# EAGLE board BACKPLANE-2UP-PA1 (EAGLE 9.4.2)
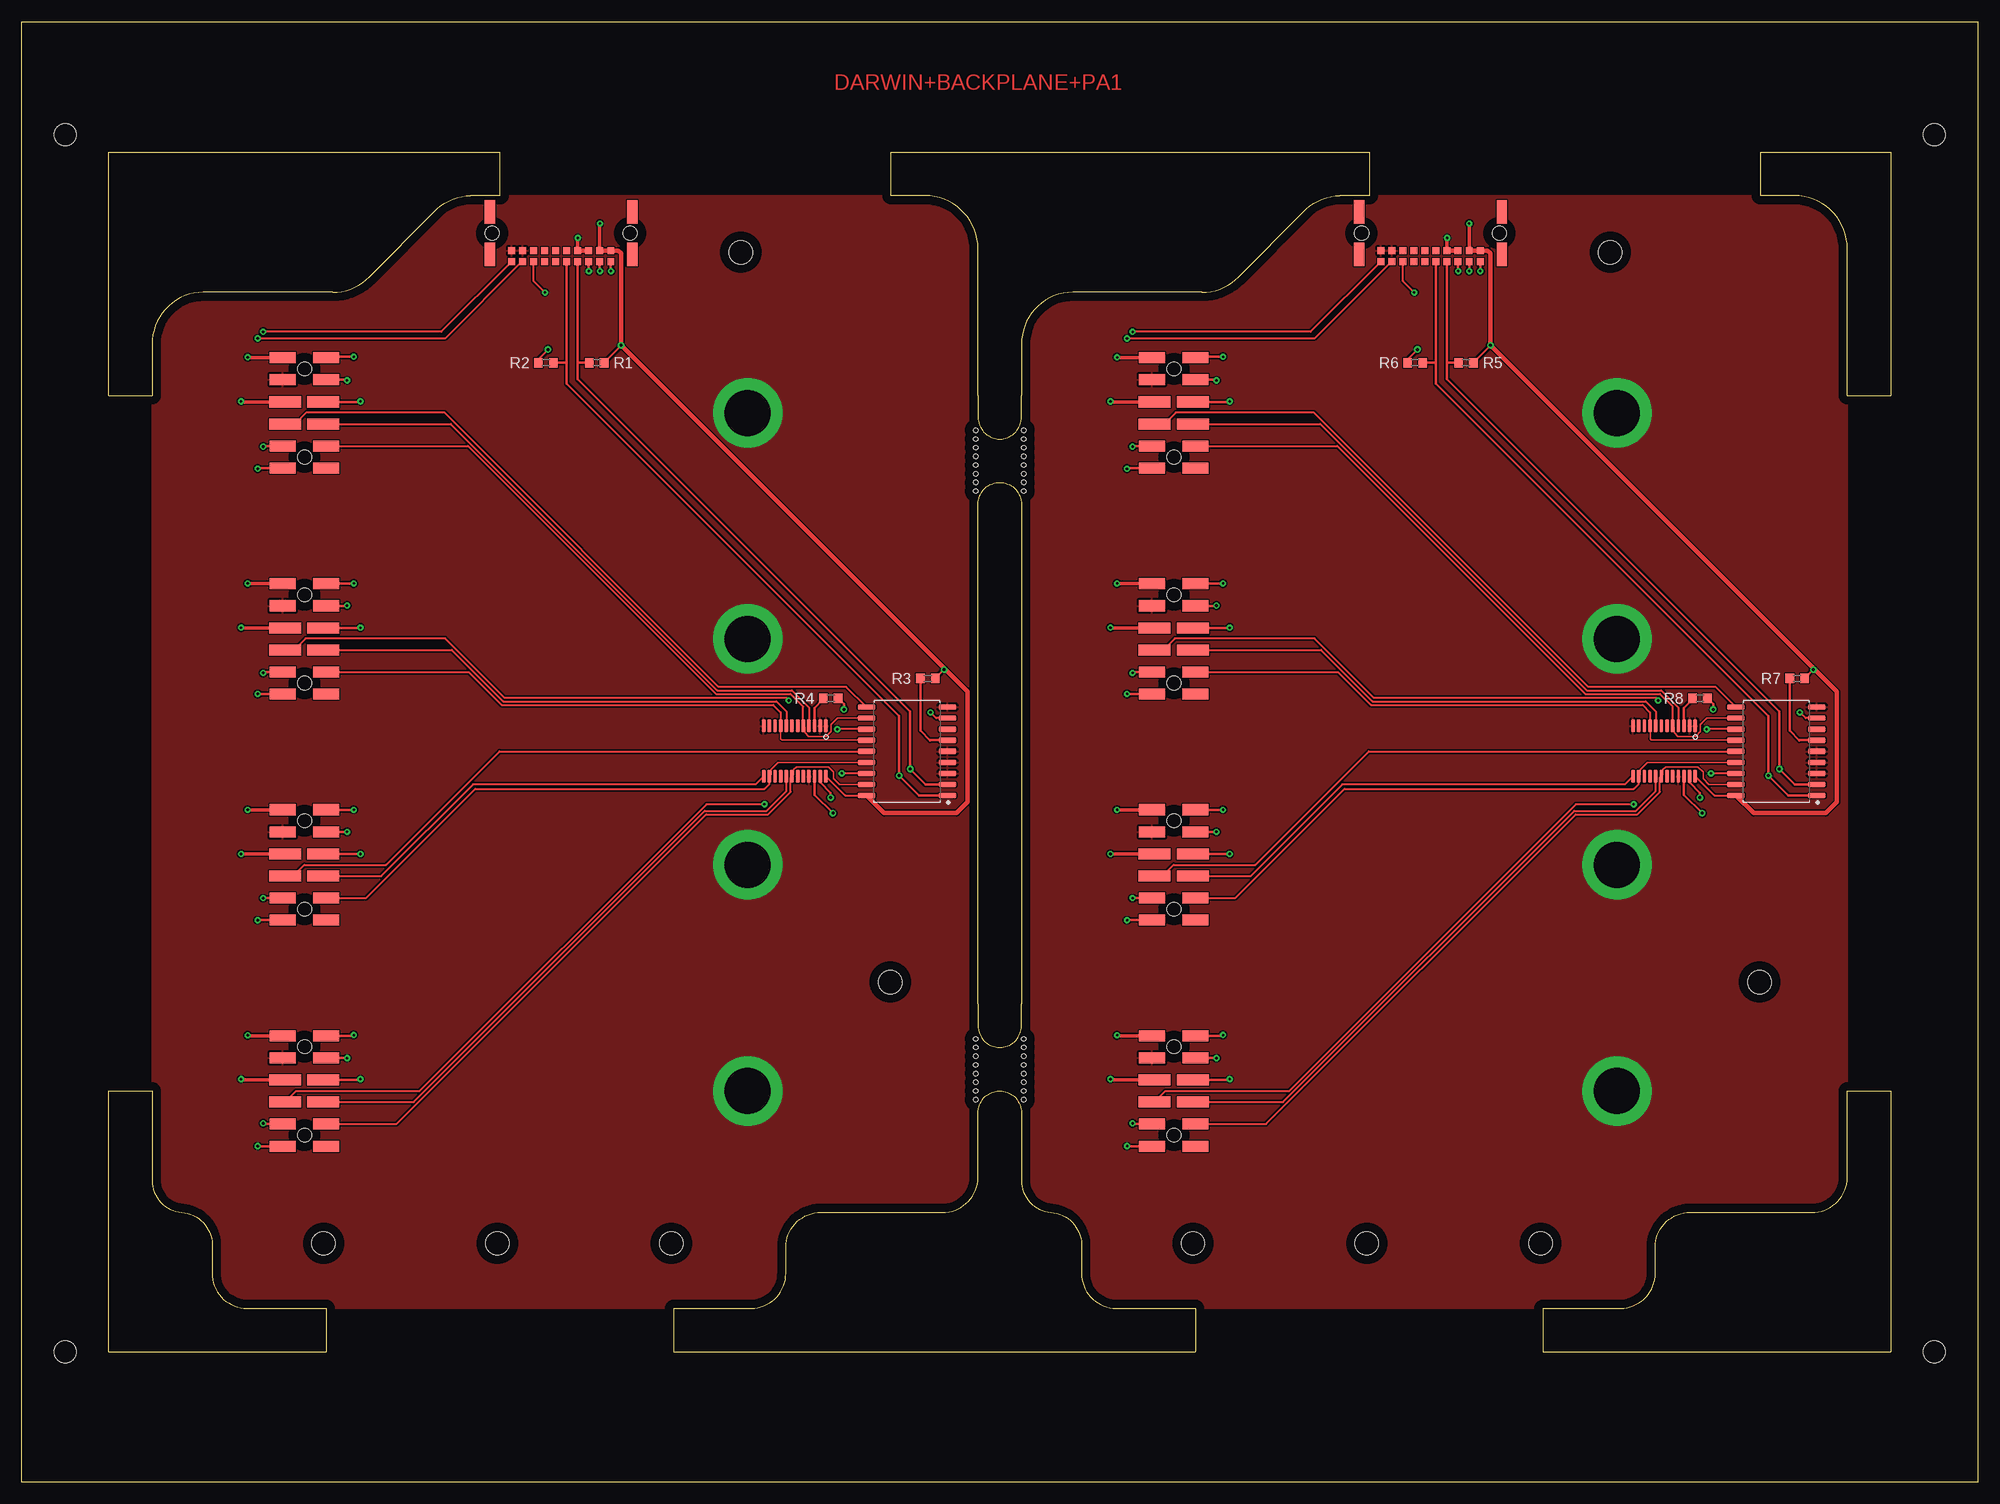
[diagram p0: board, top side]
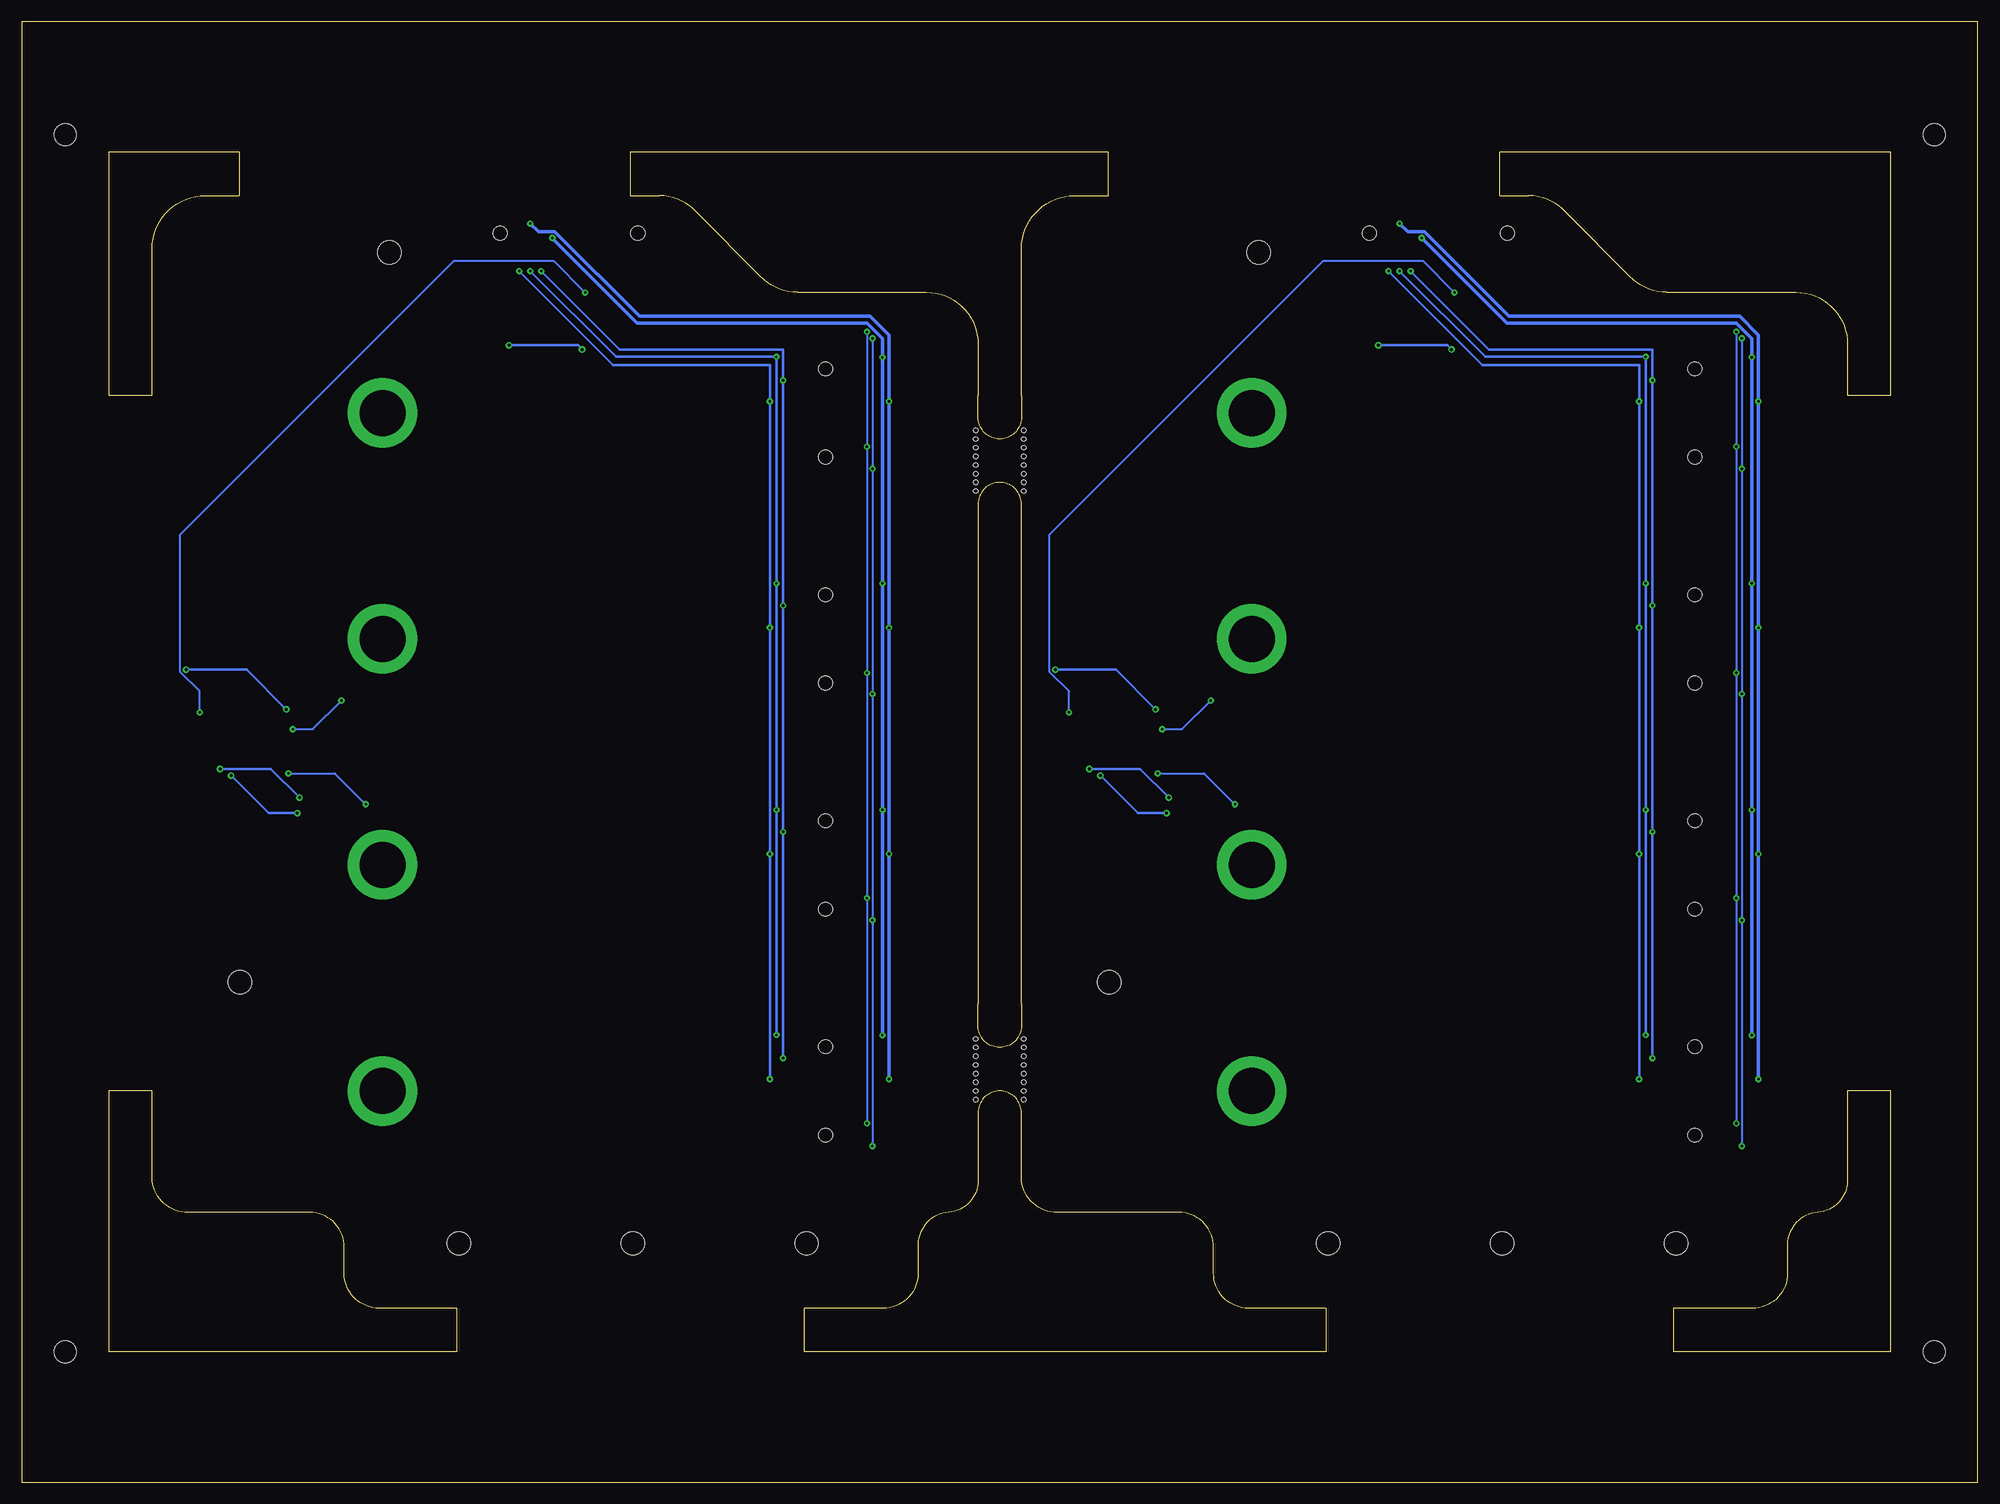
[diagram p1: board, bottom side, seen from below]

Size 225 x 168 mm. Coordinates in mm from the lower left corner, seen from the top.
Outline: 35.75,136.88 20.9,136.88 arc90 15,130.88 15,125 10,125 10,153 55,153 55,148 51.65,148 arc45 47.38,146.1 40.01,138.66 arc-45 35.75,136.88
Outline: 110,141.88 arc90 103.9,148 100,148 100,153 155,153 155,148 151.65,148 arc45 147.38,146.1 140.01,138.66 arc-45 135.75,136.88 120.9,136.88 arc90 115,130.88 115,125 115,122.5 arc-90 112.5,120 arc-90 110,122.5 110,125 110,141.88
Outline: 15,35.02 arc90 18.4,31.02 arc-90 21.9,27.02 21.9,24.02 arc90 25.9,20 35,20 35,15 10,15 10,45 15,45 15,35.02
Outline: 83.9,20 arc90 87.9,24.02 87.9,27.02 arc-90 91.9,31.02 105.9,31.02 arc90 110,35.02 110,40 110,42.5 arc-90 112.5,45 arc-90 115,42.5 115,40 115,35.02 arc90 118.4,31.02 arc-90 121.9,27.02 121.9,24.02 arc90 125.9,20 135,20 135,15 75,15 75,20 83.9,20
Outline: 210,141.88 arc90 203.9,148 200,148 200,153 215,153 215,125 210,125 210,141.88
Outline: 183.9,20 arc90 187.9,24.02 187.9,27.02 arc-90 191.9,31.02 205.9,31.02 arc90 210,35.02 210,45 215,45 215,15 175,15 175,20 183.9,20
Outline: 0,0 0,168 225,168 225,0 0,0
Outline: 110,110 110,112.5 arc-90 112.5,115 arc-90 115,112.5 115,110 115,55 115,52.5 arc-90 112.5,50 arc-90 110,52.5 110,55 110,110
Copper layers (1*16): Top 0.035mm / dielectric 1.5mm / Bottom 0.035mm
Design rules "default": minimum track width 6mil, minimum drill 0.35mm, track to track 6mil, track to pad 6mil, pad to pad 6mil, via to via 6mil, smd to smd 6mil, copper to edge 40mil, drill to drill 6mil, minimum pad ring 10mil, minimum via ring 8mil, stop-mask expansion 4mil, vias tented up to drill 0mil, thermal gap 10mil
Holes 2.7 mm at 34.72,27.47 54.72,27.47 74.72,27.47 99.9,57.52 82.72,141.47 134.72,27.47 154.72,27.47 174.72,27.47 199.9,57.52 182.72,141.47
Holes 2.54 mm at 5,155 5,15 220,15 220,155
Holes 0.5 mm at 109.75,121 109.75,120 109.75,119 109.75,118 109.75,117 109.75,116 109.75,115 109.75,114 115.25,121 115.25,120 115.25,119 115.25,118 115.25,117 115.25,116 115.25,115 115.25,114 109.75,51 109.75,50 109.75,49 109.75,48 109.75,47 109.75,46 109.75,45 109.75,44 115.25,51 115.25,50 115.25,49 115.25,48 115.25,47 115.25,46 115.25,45 115.25,44

## Footprints (pad centres in the part's own frame; a part is rotated, then mirrored left to right if it is on the bottom)
R0603 = smd 1 x 1.1: 1 -0.85,0; 2 0.85,0
SOIC18-W = smd 2.052 x 0.602: 1 -4.654,5.08; 2 -4.654,3.81; 3 -4.654,2.54; 4 -4.654,1.27; 5 -4.654,0; 6 -4.654,-1.27; 7 -4.654,-2.54; 8 -4.654,-3.81; 9 -4.654,-5.08; 10 4.654,-5.08; 11 4.654,-3.81; 12 4.654,-2.54; 13 4.654,-1.27; 14 4.654,0; 15 4.654,1.27; 16 4.654,2.54; 17 4.654,3.81; 18 4.654,5.08
12PH = smd 3 x 1.27: 1 -2.5,6.35; 2 -2.5,3.81; 5 -2.5,-3.81; 6 -2.5,-6.35; 7 2.5,-6.35; 8 2.5,-3.81; 11 2.5,3.81; 12 2.5,6.35 | smd 3.68 x 1.27: 3 -2.2,1.27; 4 -2.2,-1.27; 9 2.2,-1.27; 10 2.2,1.27 | hole 1.58: 0.041,5.08; 0.041,-5.08
TSSOP-24 = smd 1.5 x 0.45: PIN1 -3,3; PIN2 -3,2.35; PIN3 -3,1.7; PIN4 -3,1.05; PIN5 -3,0.4; PIN6 -3,-0.25; PIN7 -3,-0.9; PIN8 -3,-1.55; PIN9 -3,-2.2; PIN10 -3,-2.85; PIN11 -3,-3.5; PIN12 -3,-4.15; PIN13 2.8,-4.15; PIN14 2.8,-3.5; PIN15 2.8,-2.85; PIN16 2.8,-2.2; PIN17 2.8,-1.55; PIN18 2.8,-0.9; PIN19 2.8,-0.25; PIN20 2.8,0.4; PIN21 2.8,1.05; PIN22 2.8,1.7; PIN23 2.8,2.35; PIN24 2.8,3
M55-7102042R = smd 0.8 x 0.8: P1 -5.715,3.27; P2 -4.445,3.27; P3 -3.175,3.27; P4 -1.905,3.27; P5 -0.635,3.27; P6 0.635,3.27; P7 1.905,3.27; P8 3.175,3.27; P9 4.445,3.27; P10 5.715,3.27; P11 5.715,2; P12 4.445,2; P13 3.175,2; P14 1.905,2; P15 0.635,2; P16 -0.635,2; P17 -1.905,2; P18 -3.175,2; P19 -4.445,2; P20 -5.715,2 | smd 1.2 x 2.7: PAD0 -8.21,-2.45; PAD1 8.21,-2.45; PAD2 8.21,2.45; PAD3 -8.21,2.45 | hole 1.65: -7.925,0; 7.925,0

## Placement (x,y rotation side)
R1  [R0603]  66.13,128.78 0 top
R2  [R0603]  60.29,128.78 180 top
R3  [R0603]  104.23,92.45 180 top
R4  [R0603]  93.05,90.17 180 top
R5  [R0603]  166.13,128.78 0 top
R6  [R0603]  160.29,128.78 180 top
R7  [R0603]  204.23,92.45 180 top
R8  [R0603]  193.05,90.17 180 top
U$1  MCP23008  [SOIC18-W]  101.83,84.07 180 top
U$2  2X6-HEADERSDS  [12PH]  32.5,123 0 top
U$3  2X6-HEADERSDS  [12PH]  32.5,97 0 top
U$4  2X6-HEADERSDS  [12PH]  32.5,71 0 top
U$5  2X6-HEADERSDS  [12PH]  32.5,45 0 top
U$6  TCA9548A  [TSSOP-24]  89.5,84 270 top
U$7  M55-6102042R7102(M)  [M55-7102042R]  162.05,143.68 180 top
U$8  MCP23008  [SOIC18-W]  201.83,84.07 180 top
U$9  2X6-HEADERSDS  [12PH]  132.5,123 0 top
U$10  2X6-HEADERSDS  [12PH]  132.5,97 0 top
U$11  2X6-HEADERSDS  [12PH]  132.5,71 0 top
U$12  2X6-HEADERSDS  [12PH]  132.5,45 0 top
U$13  M55-6102042R7102(M)  [M55-7102042R]  62.05,143.68 180 top
U$14  TCA9548A  [TSSOP-24]  189.5,84 270 top

## Library data of the parts
R1-R8 = rcl; SPICEPREFIX: R
U$1-U$14 = Conservify

## Nets
3V1: R5.2 R6.2 R7.1 R8.1 U$7.P19 U$7.P20 U$8.18 U$9.3 U$10.3 U$11.3 U$12.3 U$14.PIN24
3V3: R1.2 R2.2 R3.1 R4.1 U$1.18 U$2.3 U$3.3 U$4.3 U$5.3 U$6.PIN24 U$13.P19 U$13.P20
!RESET: R3.2 U$1.6
!RESET1: R7.2 U$8.6
EEPROM_PROT: U$2.5 U$3.5 U$4.5 U$5.5 U$13.P10
EEPROM_PROT1: U$7.P10 U$9.5 U$10.5 U$11.5 U$12.5
GND: U$1.3 U$1.4 U$1.5 U$1.9 U$2.2 U$3.2 U$4.2 U$5.2 U$6.PIN1 U$6.PIN2 U$6.PIN12 U$6.PIN21 U$13.P11 U$13.P12
GND1: U$7.P11 U$7.P12 U$8.3 U$8.4 U$8.5 U$8.9 U$9.2 U$10.2 U$11.2 U$12.2 U$14.PIN1 U$14.PIN2 U$14.PIN12 U$14.PIN21
HOTSWAP_INT: U$1.8 U$13.P8
HOTSWAP_INT1: U$7.P8 U$8.8
M0_ENABLE: U$1.10 U$2.4
M0_ENABLE1: U$8.10 U$9.4
M1_ENABLE: U$1.12 U$3.4
M1_ENABLE1: U$8.12 U$10.4
M2_ENABLE: U$1.14 U$4.4
M2_ENABLE1: U$8.14 U$11.4
M3_ENABLE: U$1.16 U$5.4
M3_ENABLE1: U$8.16 U$12.4
MOD_G1: U$7.P9 U$9.6 U$10.6 U$11.6 U$12.6
MOD_G2: U$2.6 U$3.6 U$4.6 U$5.6 U$13.P9
MOD_G3: U$7.P7
MOD_G4: U$13.P7
MOD_G5: U$13.P6
MOD_G6: U$7.P6
MOD_MISO: U$2.10 U$3.10 U$4.10 U$5.10 U$13.P1
MOD_MISO1: U$7.P1 U$9.10 U$10.10 U$11.10 U$12.10
MOD_MOSI: U$2.11 U$3.11 U$4.11 U$5.11 U$13.P3
MOD_MOSI1: U$7.P3 U$9.11 U$10.11 U$11.11 U$12.11
MOD_SCK: U$2.12 U$3.12 U$4.12 U$5.12 U$13.P2
MOD_SCK1: U$7.P2 U$9.12 U$10.12 U$11.12 U$12.12
MOD_SCL: R2.1 U$1.1 U$6.PIN22 U$13.P5
MOD_SCL1: R6.1 U$7.P5 U$8.1 U$14.PIN22
MOD_SDA: R1.1 U$1.2 U$6.PIN23 U$13.P4
MOD_SDA1: R5.1 U$7.P4 U$8.2 U$14.PIN23
N$1: R8.2 U$14.PIN3
N$2: R4.2 U$6.PIN3
SC0: U$1.11 U$2.8 U$6.PIN5
SC1: U$1.13 U$3.8 U$6.PIN9
SC2: U$1.15 U$4.8 U$6.PIN14
SC3: U$1.17 U$5.8 U$6.PIN18
SC4: U$8.11 U$9.8 U$14.PIN5
SC5: U$8.13 U$10.8 U$14.PIN9
SC6: U$8.15 U$11.8 U$14.PIN14
SC7: U$8.17 U$12.8 U$14.PIN18
SD0: U$2.9 U$6.PIN4
SD1: U$3.9 U$6.PIN8
SD2: U$4.9 U$6.PIN13
SD3: U$5.9 U$6.PIN17
SD4: U$9.9 U$14.PIN4
SD5: U$12.9 U$14.PIN17
SD6: U$11.9 U$14.PIN13
SD7: U$10.9 U$14.PIN8
UNREG: U$2.1 U$3.1 U$4.1 U$5.1 U$13.P17 U$13.P18
UNREG1: U$7.P17 U$7.P18 U$9.1 U$10.1 U$11.1 U$12.1
XX1: U$13.P13
XX2: U$13.P14
XX3: U$13.P15
XX4: U$13.P16
XX5: U$7.P15
XX6: U$7.P13
XX7: U$7.P14
XX8: U$7.P16

## Tracks (layer width: path | path; a pad name or v marks a point on that pad's centre or on a via)
3V1  (via drill 0.3, 0.35)
  Top 0.254: U$14.PIN24 194.71,78.99 U$8.18
  Top 0.305: R7.1 v206.09,93.47 206.26,93.47 | R8.1 194.58,89.49 v194.58,88.9 | R5.2 168.95,130.75 v168.95,130.78 | R6.2 159.44,129.2 v160.54,130.3
  Top 0.406: U$7.P19 166.49,144.76 v166.51,144.78 | U$9.3 125.3,124.27 v125.23,124.33 | U$10.3 125.26,98.27 v125.23,98.3 | U$11.3 125.24,72.27 v125.23,72.26 | U$12.3 125.32,46.27 v125.23,46.35
  Top 0.508: U$8.18 199.21,76.96 207.53,76.96 208.8,78.23 208.8,90.93 206.26,93.47 v168.95,130.78 168.95,141.35 168.62,141.68 U$7.P20 U$7.P19
  Bottom 0.305: v160.54,130.3 161.02,130.78 v168.95,130.78 | v194.58,88.9 199.15,93.47 v206.09,93.47
  Bottom 0.406: v166.51,144.78 165.57,143.84 163.68,143.84 153.95,134.11 127.39,134.11 125.23,131.95 v125.23,124.33 v125.23,98.3 v125.23,72.26 v125.23,46.35
3V3  (via drill 0.3, 0.35)
  Top 0.254: U$6.PIN24 94.71,78.99 U$1.18
  Top 0.305: R3.1 v106.09,93.47 106.26,93.47 | R4.1 94.58,89.49 v94.58,88.9 | R1.2 68.95,130.75 v68.95,130.78 | R2.2 59.44,129.2 v60.54,130.3
  Top 0.406: U$13.P19 66.49,144.76 v66.51,144.78 | U$2.3 25.3,124.27 v25.23,124.33 | U$3.3 25.26,98.27 v25.23,98.3 | U$4.3 25.24,72.27 v25.23,72.26 | U$5.3 25.32,46.27 v25.23,46.35
  Top 0.508: U$1.18 99.21,76.96 107.53,76.96 108.8,78.23 108.8,90.93 106.26,93.47 v68.95,130.78 68.95,141.35 68.62,141.68 U$13.P20 U$13.P19
  Bottom 0.305: v60.54,130.3 61.02,130.78 v68.95,130.78 | v94.58,88.9 99.15,93.47 v106.09,93.47
  Bottom 0.406: v66.51,144.78 65.57,143.84 63.67,143.84 53.95,134.11 27.39,134.11 25.23,131.95 v25.23,124.33 v25.23,98.3 v25.23,72.26 v25.23,46.35
!RESET
  Top 0.305: U$1.6 104.48,85.34 103.38,86.45 R3.2
!RESET1
  Top 0.305: U$8.6 204.48,85.34 203.38,86.45 R7.2
EEPROM_PROT  (via drill 0.3)
  Top 0.254: U$13.P10 48.26,132.33 v27.77,132.33
  Top 0.305: U$2.5 27.84,119.19 v27.77,119.12 | U$3.5 27.88,93.19 v27.77,93.09 | U$4.5 27.78,67.19 v27.77,67.18 | U$5.5 27.86,41.19 v27.77,41.27
  Bottom 0.254: v27.77,132.33 v27.77,119.12 v27.77,93.09 v27.77,67.18 v27.77,41.27
EEPROM_PROT1  (via drill 0.3)
  Top 0.254: U$7.P10 148.26,132.33 v127.77,132.33
  Top 0.305: U$9.5 127.84,119.19 v127.77,119.12 | U$10.5 127.88,93.19 v127.77,93.09 | U$11.5 127.78,67.19 v127.77,67.18 | U$12.5 127.86,41.19 v127.77,41.27
  Bottom 0.254: v127.77,132.33 v127.77,119.12 v127.77,93.09 v127.77,67.18 v127.77,41.27
GND  (via drill 5.3 pad 8)
  other vias: 83.5,123 83.5,97 83.5,71 83.5,45
  pour Top: 15,148 110,148 110,20 15,20
GND1  (via drill 5.3 pad 8)
  other vias: 183.5,123 183.5,97 183.5,71 183.5,45
  pour Top: 115,148 210,148 210,20 115,20
HOTSWAP_INT  (via drill 0.3)
  Top 0.254: U$1.8 105.19,87.88 v104.53,88.54 | v60.18,136.85 58.87,138.16 U$13.P8
  Bottom 0.254: v104.53,88.54 104.53,90.98 106.75,93.2 106.75,109.03 75.27,140.51 63.84,140.51 v60.18,136.85
HOTSWAP_INT1  (via drill 0.3)
  Top 0.254: U$8.8 205.19,87.88 v204.53,88.54 | v160.18,136.85 158.87,138.16 U$7.P8
  Bottom 0.254: v204.53,88.54 204.53,90.98 206.75,93.2 206.75,109.03 175.27,140.51 163.84,140.51 v160.18,136.85
M0_ENABLE
  Top 0.254: U$1.10 94.84,91.49 80.18,91.49 48.62,123.04 32.74,123.04 31.43,121.73 U$2.4
M0_ENABLE1
  Top 0.254: U$8.10 194.84,91.49 180.18,91.49 148.62,123.04 132.74,123.04 131.43,121.73 U$9.4
M1_ENABLE  (via drill 0.3)
  Top 0.254: U$1.12 v93.82,86.61 v93.81,86.61 | v88.23,89.91 88.23,89.98 87.99,90.22 55.54,90.22 48.72,97.04 32.64,97.04 31.33,95.73 U$3.4
  Bottom 0.254: v93.81,86.61 91.53,86.61 v88.23,89.91
M1_ENABLE1  (via drill 0.3)
  Top 0.254: U$8.12 v193.82,86.61 v193.81,86.61 | v188.23,89.91 188.23,89.98 187.99,90.22 155.54,90.22 148.72,97.04 132.64,97.04 131.33,95.73 U$10.4
  Bottom 0.254: v193.81,86.61 191.53,86.61 v188.23,89.91
M2_ENABLE
  Top 0.254: U$4.4 31.21,69.73 32.5,71.02 41.9,71.02 54.95,84.07 U$1.14
M2_ENABLE1
  Top 0.254: U$11.4 131.21,69.73 132.5,71.02 141.9,71.02 154.95,84.07 U$8.14
M3_ENABLE  (via drill 0.3)
  Top 0.254: U$1.16 v94.32,81.53 | v85.43,77.98 78.76,77.98 45.74,44.96 31.53,44.96 U$5.4
  Bottom 0.254: v94.32,81.53 88.99,81.53 v85.43,77.98
M3_ENABLE1  (via drill 0.3)
  Top 0.254: U$8.16 v194.32,81.53 | v185.43,77.98 178.76,77.98 145.74,44.96 131.53,44.96 U$12.4
  Bottom 0.254: v194.32,81.53 188.99,81.53 v185.43,77.98
MOD_G1  (via drill 0.3)
  Top 0.254: U$7.P9 157.53,140.41 148.69,131.57 v127.14,131.57
  Top 0.305: U$9.6 127.2,116.65 v127.14,116.58 | U$10.6 127.17,90.65 v127.14,90.68 | U$11.6 v127.15,64.65 v127.14,64.64 | U$12.6 v127.15,38.65 v127.14,38.66
  Bottom 0.254: v127.14,131.57 v127.14,116.58 v127.14,90.68 v127.14,64.64 v127.14,38.66
MOD_G2  (via drill 0.3)
  Top 0.254: U$13.P9 57.53,140.41 48.69,131.57 v27.14,131.57
  Top 0.305: U$2.6 27.2,116.65 v27.14,116.58 | U$3.6 27.17,90.65 v27.14,90.68 | U$4.6 v27.15,64.65 v27.14,64.64 | U$5.6 v27.15,38.65 v27.14,38.66
  Bottom 0.254: v27.14,131.57 v27.14,116.58 v27.14,90.68 v27.14,64.64 v27.14,38.66
MOD_MISO  (via drill 0.3)
  Top 0.305: U$13.P1 67.76,139.33 v67.78,139.32 | U$2.10 38.89,124.27 v38.95,124.33 | U$3.10 38.92,98.27 v38.95,98.3 | U$4.10 v38.94,72.27 v38.95,72.26 | U$5.10 38.87,46.27 v38.95,46.35
  Bottom 0.305: v67.78,139.32 56.98,128.52 38.95,128.52 v38.95,124.33 v38.95,98.3 v38.95,72.26 v38.95,46.35
MOD_MISO1  (via drill 0.3)
  Top 0.305: U$7.P1 167.76,139.33 v167.78,139.32 | U$9.10 138.89,124.27 v138.95,124.33 | U$10.10 138.92,98.27 v138.95,98.3 | U$11.10 v138.94,72.27 v138.95,72.26 | U$12.10 138.87,46.27 v138.95,46.35
  Bottom 0.305: v167.78,139.32 156.98,128.52 138.95,128.52 v138.95,124.33 v138.95,98.3 v138.95,72.26 v138.95,46.35
MOD_MOSI  (via drill 0.3)
  Top 0.305: U$13.P3 65.22,139.33 v65.24,139.32 | U$2.11 37.36,126.81 v37.43,126.74 | U$3.11 37.4,100.81 v37.43,100.84 | U$4.11 37.42,74.81 v37.43,74.8 | U$5.11 37.38,48.81 v37.43,48.77
  Bottom 0.305: v65.24,139.32 56.22,130.3 37.43,130.3 v37.43,126.74 v37.43,100.84 v37.43,74.8 v37.43,48.77
MOD_MOSI1  (via drill 0.3)
  Top 0.305: U$7.P3 165.22,139.33 v165.24,139.32 | U$9.11 137.36,126.81 v137.43,126.74 | U$10.11 137.4,100.81 v137.43,100.84 | U$11.11 137.42,74.81 v137.43,74.8 | U$12.11 137.38,48.81 v137.43,48.77
  Bottom 0.305: v165.24,139.32 156.22,130.3 137.43,130.3 v137.43,126.74 v137.43,100.84 v137.43,74.8 v137.43,48.77
MOD_SCK  (via drill 0.3)
  Top 0.305: U$13.P2 66.49,139.33 v66.51,139.32 | U$2.12 35.11,129.46 v38.19,129.46 | U$3.12 38.16,103.35 v38.19,103.38 | U$4.12 v38.18,77.35 v38.19,77.34 | U$5.12 38.1,51.35 v38.19,51.43
  Bottom 0.305: v66.51,139.32 56.65,129.46 v38.19,129.46 v38.19,103.38 v38.19,77.34 v38.19,51.43
MOD_SCK1  (via drill 0.3)
  Top 0.305: U$7.P2 166.49,139.33 v166.51,139.32 | U$9.12 135.11,129.46 v138.19,129.46 | U$10.12 138.16,103.35 v138.19,103.38 | U$11.12 v138.18,77.35 v138.19,77.34 | U$12.12 138.1,51.35 v138.19,51.43
  Bottom 0.305: v166.51,139.32 156.65,129.46 v138.19,129.46 v138.19,103.38 v138.19,77.34 v138.19,51.43
MOD_SCL  (via drill 0.35)
  Top 0.305: U$13.P5 62.68,128.78 | 62.68,128.78 62.68,126.38 100.93,88.14 v100.93,81.28 103.21,78.99 U$1.1 | U$6.PIN22 91.2,79.07 v93.31,76.96 | R2.1 62.68,128.78
  Bottom 0.305: v93.31,76.96 96.61,76.96 v100.93,81.28
MOD_SCL1  (via drill 0.35)
  Top 0.305: U$7.P5 162.68,128.78 | 162.68,128.78 162.68,126.38 200.93,88.14 v200.93,81.28 203.21,78.99 U$8.1 | U$14.PIN22 191.2,79.07 v193.31,76.96 | R6.1 162.68,128.78
  Bottom 0.305: v193.31,76.96 196.61,76.96 v200.93,81.28
MOD_SDA  (via drill 0.35)
  Top 0.305: U$13.P4 63.95,128.78 | 63.95,128.78 63.95,126.89 102.2,88.64 v102.2,82.04 103.97,80.26 U$1.2 | v93.05,78.74 93.05,79.3 91.87,80.48 91.87,81.18 U$6.PIN23 | R1.1 63.95,128.78
  Bottom 0.305: v93.05,78.74 96.35,82.04 v102.2,82.04
MOD_SDA1  (via drill 0.35)
  Top 0.305: U$7.P4 163.95,128.78 | 163.95,128.78 163.95,126.89 202.2,88.64 v202.2,82.04 203.97,80.26 U$8.2 | v193.05,78.74 193.05,79.3 191.87,80.48 191.87,81.18 U$14.PIN23 | R5.1 163.95,128.78
  Bottom 0.305: v193.05,78.74 196.35,82.04 v202.2,82.04
N$1
  Top 0.305: R8.2 192.2,90.08 191.2,89.08 U$14.PIN3
N$2
  Top 0.305: R4.2 92.2,90.08 91.2,89.08 U$6.PIN3
SC0
  Top 0.152: U$6.PIN5 90.1,86.8 90.1,86.21 90.5,85.8 92.55,85.8 93.1,86.36 93.1,87.17 93.82,87.88 U$1.11
  Top 0.254: U$2.8 51.33,119.19 79.84,90.68 88.43,90.68 89.9,89.2 U$6.PIN5
SC1
  Top 0.152: U$6.PIN9 87.31,86.99 87.31,85.49 87.46,85.34 U$1.13
  Top 0.254: U$3.8 51.42,93.19 55.21,89.41 86.45,89.41 87.3,88.55 U$6.PIN9
SC2
  Top 0.152: U$6.PIN14 86.2,81.4 86.2,81.99 87.01,82.8 U$1.15
  Top 0.254: U$4.8 39.59,67.19 52.16,79.75 85.43,79.75 86,80.32 U$6.PIN14
SC3
  Top 0.152: U$6.PIN18 88.8,81.4 88.8,81.99 89.1,82.29 92.8,82.29 93.41,81.68 93.41,80.92 94.07,80.26 U$1.17
  Top 0.254: U$5.8 43.12,41.19 78.74,76.81 85.85,76.81 88.45,79.41 88.45,81.05 U$6.PIN18
SC4
  Top 0.152: U$14.PIN5 190.1,86.8 190.1,86.21 190.5,85.8 192.54,85.8 193.1,86.36 193.1,87.17 193.82,87.88 U$8.11
  Top 0.254: U$9.8 151.33,119.19 179.84,90.68 188.43,90.68 189.9,89.2 U$14.PIN5
SC5
  Top 0.152: U$14.PIN9 187.31,86.99 187.31,85.49 187.46,85.34 U$8.13
  Top 0.254: U$10.8 151.42,93.19 155.21,89.41 186.45,89.41 187.3,88.55 U$14.PIN9
SC6
  Top 0.152: U$14.PIN14 186.2,81.4 186.2,81.99 187.01,82.8 U$8.15
  Top 0.254: U$11.8 139.59,67.19 152.16,79.75 185.43,79.75 186,80.32 U$14.PIN14
SC7
  Top 0.152: U$14.PIN18 188.8,81.4 188.8,81.99 189.1,82.29 192.8,82.29 193.41,81.68 193.41,80.92 194.07,80.26 U$8.17
  Top 0.254: U$12.8 143.12,41.19 178.74,76.81 185.85,76.81 188.45,79.41 188.45,81.05 U$14.PIN18
SD0
  Top 0.254: U$2.9 49.37,121.73 80.01,91.08 88.6,91.08 90.55,89.13 U$6.PIN4
SD1
  Top 0.254: U$3.9 49.46,95.73 55.37,89.81 86.8,89.81 87.95,88.67 U$6.PIN8
SD2
  Top 0.254: U$4.9 41.37,69.73 51.9,80.26 84.41,80.26 U$6.PIN13
SD3
  Top 0.254: U$5.9 45.09,43.73 78.57,77.21 85.69,77.21 87.95,79.48 U$6.PIN17
SD4
  Top 0.254: U$9.9 149.37,121.73 180.01,91.08 188.6,91.08 190.55,89.13 U$14.PIN4
SD5
  Top 0.254: U$12.9 145.09,43.73 178.57,77.21 185.69,77.21 187.95,79.48 U$14.PIN17
SD6
  Top 0.254: U$11.9 141.37,69.73 151.9,80.26 184.41,80.26 U$14.PIN13
SD7
  Top 0.254: U$10.9 149.46,95.73 155.37,89.81 186.8,89.81 187.95,88.67 U$14.PIN8
UNREG  (via drill 0.3)
  Top 0.406: U$13.P17 63.95,143.11 v63.97,143.13 | U$2.1 26.05,129.35 v26,129.4 | U$3.1 26.02,103.35 v26,103.38 | U$4.1 v26,77.35 v26,77.34 | U$5.1 26.05,51.35 v26,51.4
  Top 0.508: U$13.P18 U$13.P17
  Bottom 0.406: v63.97,143.13 54.19,133.35 27.77,133.35 26,131.57 v26,129.4 v26,103.38 v26,77.34 v26,51.4
UNREG1  (via drill 0.3)
  Top 0.406: U$7.P17 163.95,143.11 v163.97,143.13 | U$9.1 126.05,129.35 v126,129.4 | U$10.1 126.02,103.35 v126,103.38 | U$11.1 v126,77.35 v126,77.34 | U$12.1 126.05,51.35 v126,51.4
  Top 0.508: U$7.P18 U$7.P17
  Bottom 0.406: v163.97,143.13 154.19,133.35 127.77,133.35 126,131.57 v126,129.4 v126,103.38 v126,77.34 v126,51.4

## Text on the board
Top: DARWIN+BACKPLANE+PA1